# EAGLE board untitled (EAGLE 6.1)
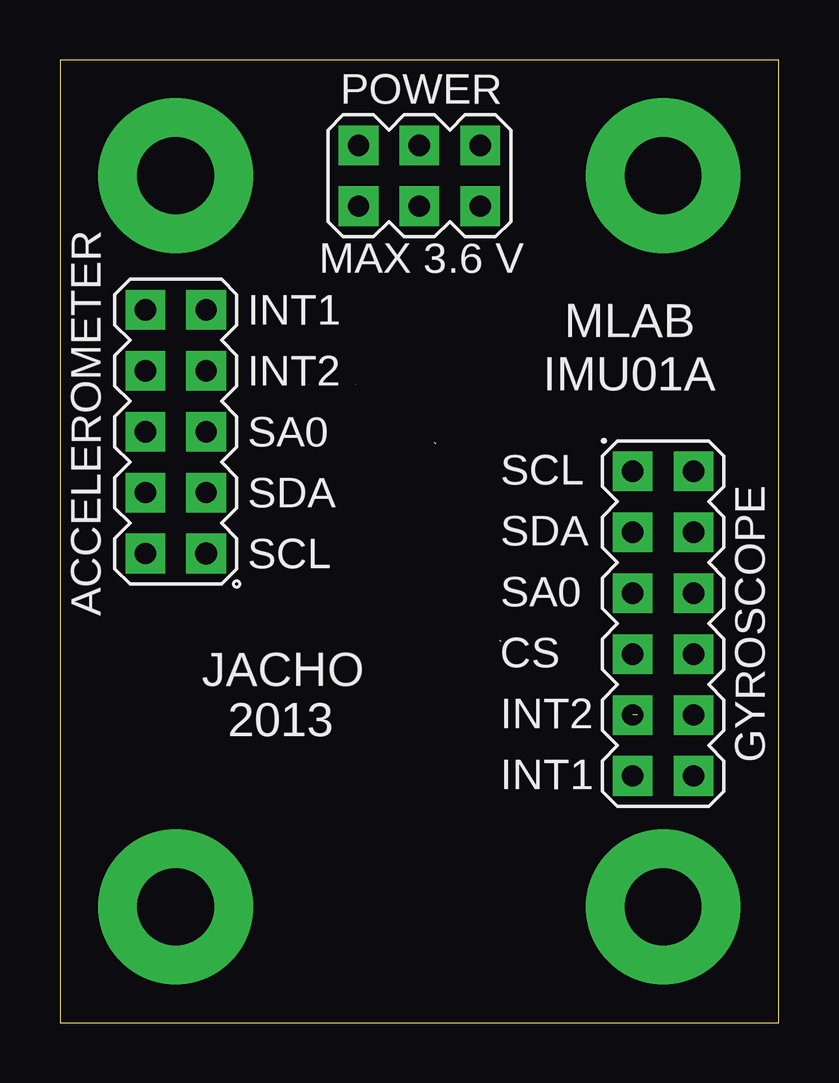
[diagram p0: board, top side]
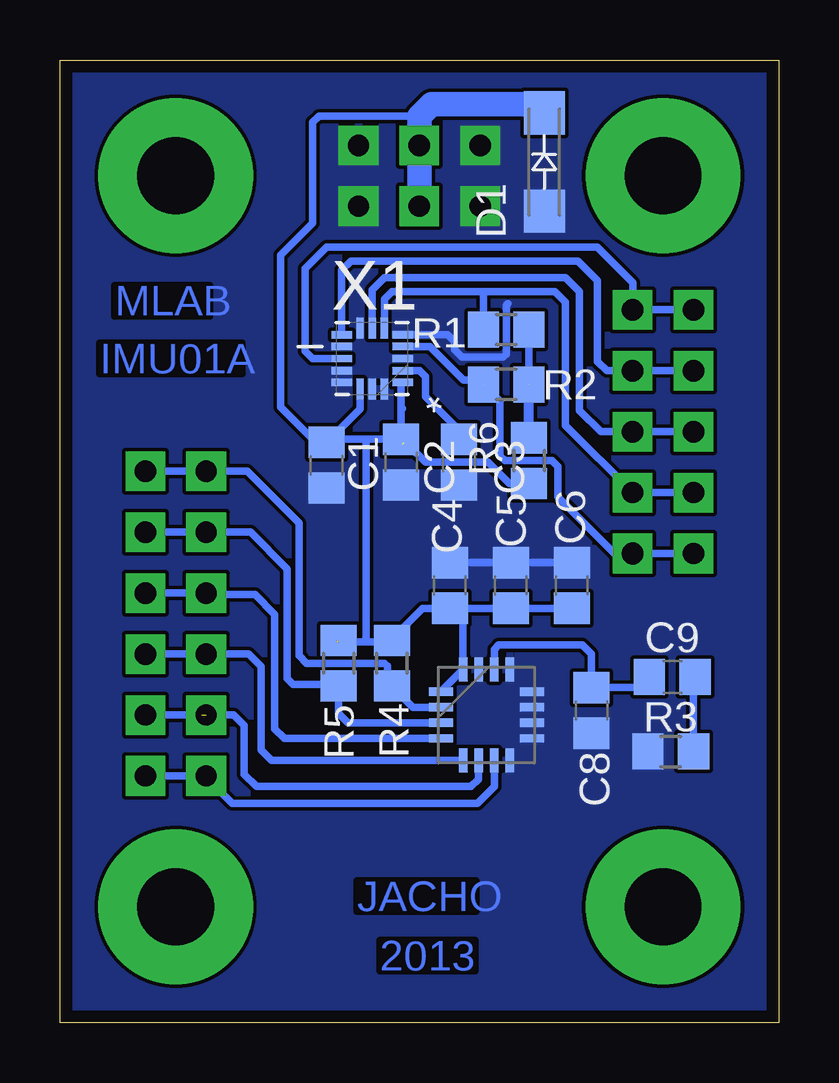
[diagram p1: board, bottom side, seen from below]

Size 29.97 x 40.13 mm. Coordinates in mm from the lower left corner, seen from the top.
Outline: 0,0 29.97,0 29.97,40.13 0,40.13 0,0
Copper layers (1*16): Top 0.035mm / dielectric 1.5mm / Bottom 0.035mm
Design rules: minimum track width 8mil, minimum drill 16mil, track to track 6mil, track to pad 6mil, pad to pad 6mil, via to via 6mil, smd to smd 6mil, copper to edge 20mil, drill to drill 8mil, minimum pad ring 10mil, minimum via ring 8mil, stop-mask expansion 4mil, vias tented up to drill 25mil, thermal gap 0mil

## Footprints (pad centres in the part's own frame; a part is rotated, then mirrored left to right if it is on the bottom)
C0805 = smd 1.3 x 1.5: 1 -0.95,0; 2 0.95,0
SMA = smd 1.8 x 1.7: A -2.05,0; K 2.05,0
R0805 = smd 1.3 x 1.5: 1 -0.95,0; 2 0.95,0
MA03-2 = drill 0.889 pad 1.651 square: 1 -2.54,-1.27; 2 -2.54,1.27; 3 0,-1.27; 4 0,1.27; 5 2.54,-1.27; 6 2.54,1.27
MA06-2 = drill 0.889 pad 1.651 square: 1 -6.35,-1.27; 2 -6.35,1.27; 3 -3.81,-1.27; 4 -3.81,1.27; 5 -1.27,-1.27; 6 -1.27,1.27; 7 1.27,-1.27; 8 1.27,1.27; 9 3.81,-1.27; 10 3.81,1.27; 11 6.35,-1.27; 12 6.35,1.27
MA05-2 = drill 0.914 pad 1.651 square: 1 -5.08,-1.27 | drill 0.889 pad 1.651 square: 2 -5.08,1.27; 3 -2.54,-1.27; 4 -2.54,1.27; 5 0,-1.27; 6 0,1.27; 7 2.54,-1.27; 8 2.54,1.27; 9 5.08,-1.27; 10 5.08,1.27
QFN50P300X300X100-16N = smd 0.864 x 0.305: 1 -1.27,0.991; 2 -1.27,0.508; 3 -1.27,0; 4 -1.27,-0.508; 5 -1.27,-0.991; 9 1.27,-0.991; 10 1.27,-0.508; 11 1.27,0; 12 1.27,0.508; 13 1.27,0.991 | smd 0.305 x 0.864: 6 -0.508,-1.27; 7 0,-1.27; 8 0.508,-1.27; 14 0.508,1.27; 15 0,1.27; 16 -0.508,1.27
LGA16 = smd 1 x 0.35: 1 -1.9,0.975; 2 -1.9,0.325; 3 -1.9,-0.325; 4 -1.9,-0.975; 9 1.9,-0.975; 10 1.9,-0.325; 11 1.9,0.325; 12 1.9,0.975 | smd 0.35 x 1: 5 -0.975,-1.9; 6 -0.325,-1.9; 7 0.325,-1.9; 8 0.975,-1.9; 13 0.975,1.9; 14 0.325,1.9; 15 -0.325,1.9; 16 -0.975,1.9
SROUB3M = drill 3.2 pad 6.452: P$1 0,0

## Placement (x,y rotation side)
C1  4u7  [C0805]  18.86,23.24 270 bottom
C2  100n  [C0805]  15.75,23.37 270 bottom
C3  100n  [C0805]  13.34,23.37 270 bottom
C4  100n  [C0805]  13.72,18.22 90 bottom
C5  4u7  [C0805]  11.18,18.22 90 bottom
C6  4u7  [C0805]  8.64,18.22 90 bottom
C8  10nF  [C0805]  7.81,13.02 270 bottom
C9  470nF  [C0805]  4.45,14.41 0 bottom
D1  [SMA]  9.78,35.88 90 bottom
R1  4k7  [R0805]  11.37,28.89 180 bottom
R2  4k7  [R0805]  11.37,26.61 180 bottom
R3  10k  [R0805]  4.51,11.3 0 bottom
R4  10k  [R0805]  16.13,14.99 270 bottom
R5  10k  [R0805]  18.35,14.99 270 bottom
R6  0R  [R0805]  10.41,23.43 90 bottom
SV1  [MA03-2]  14.99,35.31 180 top
SV2  [MA06-2]  25.15,16.64 270 top
SV3  [MA05-2]  4.83,24.64 90 top
X1  MMA8451Q  [QFN50P300X300X100-16N]  16.95,27.69 180 bottom
X2  A3G4250D  [LGA16]  12.19,12.83 0 bottom
X3  SROUB3M  [SROUB3M]  4.83,4.83 0 top
X4  SROUB3M  [SROUB3M]  4.83,35.31 0 top
X5  SROUB3M  [SROUB3M]  25.15,4.83 0 top
X6  SROUB3M  [SROUB3M]  25.15,35.31 0 top

## Library data of the parts
C1-C6 C8 C9 R1-R6 = rcl
D1 X3-X6 = moje
SV1-SV3 = moje_hrebinky; OC_FARNELL: unknown; OC_NEWARK: unknown
X1 X2 = moje_cidla

## Nets
+VCC: C1.1 C2.1 C4.1 C5.1 C6.1 D1.K R4.1 R5.1 R6.1 SV1.3 SV1.4 X1.1 X1.14 X2.1 X2.16
GND: C1.2 C2.2 C3.2 C4.2 C5.2 C6.2 C8.2 D1.A R3.1 SV1.1 SV1.2 SV1.5 SV1.6 X1.3 X1.5 X1.8 X1.10 X1.12 X1.13 X1.15 X1.16 X2.8 X2.9 X2.10 X2.11 X2.12 X2.13 X2.15
N$1: R1.2 SV3.3 SV3.4 X1.6
N$2: R2.2 SV3.1 SV3.2 X1.4
N$3: SV3.5 SV3.6 X1.7
N$4: C8.1 C9.1 X2.14
N$5: C3.1 X1.2
N$6: SV2.5 SV2.6 X2.4
N$7: R1.1 R2.1 R6.2
N$9: SV2.7 SV2.8 X2.5
N$10: SV2.11 SV2.12 X2.7
N$11: SV2.9 SV2.10 X2.6
N$12: SV3.9 SV3.10 X1.11
N$13: SV3.7 SV3.8 X1.9
N$14: R4.2 SV2.1 SV2.2 X2.2
N$15: C9.2 R3.2
N$16: R5.2 SV2.3 SV2.4 X2.3

## Tracks (layer width: path | path; a pad name or v marks a point on that pad's centre or on a via)
+VCC  (2 unrouted)
  Bottom 0.305: X2.1 X2.16 13.17,16.73 C4.1 | C4.1 C5.1 C6.1 | C2.1 15.75,25.65 | 15.75,25.65 15.75,26.63 X1.1 | X1.14 17.46,25.59 C1.1 18.92,24.26 | 19.3,23.88 18.99,24.19 | 18.99,24.19 18.92,24.26 | 18.92,24.26 18.86,24.32 17.14,24.32 | 17.14,24.32 C2.1 | 18.92,24.26 18.99,24.26 | 19.05,24.19 18.99,24.26 | 18.99,24.26 18.99,24.19 | 18.99,24.19 19.3,24.19 20.76,25.65 20.76,32 19.43,33.34 19.43,37.53 19.18,37.78 14.99,37.78 | 15.68,25.59 15.75,25.65 | C2.1 15.62,24.19 15.62,24.32 15.56,24.38 | R6.1 11.24,22.48 12.13,23.37 14.73,23.37 15.43,24.07 15.62,24.07 15.68,24.13 | C4.1 14.86,17.27 16.19,15.94 R4.1 | R4.1 16.07,15.88 17.14,15.88 | 17.14,15.88 18.41,15.88 | 17.21,16 17.21,24.26 17.14,24.32 | 17.21,16 17.27,15.94 | R4.1 | 17.21,16 17.21,15.94 17.14,15.88 | 13.72,38.48 13.53,38.29
  Bottom 1.016: SV1.4 SV1.3 | SV1.3 15.05,36.64 | SV1.3 14.99,37.78 14.48,38.29 13.53,38.29 10.14,38.29 D1.K
GND
  Bottom 0.305: C6.2 C5.2 C4.2 | X1.5 13.82,28.68 13.53,28.38 13.53,28.07 13.21,27.75 11.49,27.75 11.37,27.88 11.37,29.91 11.3,29.97
  pour Bottom: -1.14,41.15 32.45,41.15 32.45,-2.6 -1.4,-2.6 -1.4,41.02
N$1
  Bottom 0.305: SV3.4 SV3.3 8.89,24.89 8.89,30.04 9.33,30.48 12.32,30.48 | X1.6 16.45,30.16 16.13,30.48 12.32,30.48 | R1.2 12.32,30.48
N$2  (1 unrouted)
  Bottom 0.305: SV3.2 SV3.1 6.86,19.56 9.21,21.91 9.21,23.18 9.46,23.43 11.43,23.43 11.62,23.62 11.62,25.91 R2.2 | X1.4 14.54,28.19 13.14,26.8 12.51,26.8 R2.2
N$3
  Bottom 0.305: SV3.6 SV3.5 7.43,24.64 8.32,25.53 8.32,30.48 8.89,31.05 16.45,31.05 16.95,30.54 X1.7
N$4
  Bottom 0.305: X2.14 11.87,15.57 11.68,15.75 8.19,15.75 7.81,15.37 C8.1 5.84,13.97 C9.1
N$5
  Bottom 0.305: C3.1 13.27,24.64 14.73,26.1 14.73,26.92 14.99,27.18 X1.2
N$6
  Bottom 0.305: X2.4 20.61,11.85 21.02,12.26 21.02,17.02 21.84,17.84 23.81,17.84 SV2.5 SV2.6
N$7  (1 unrouted)
  Bottom 0.305: R1.1 R2.1 | R2.1 | R2.1 10.48,26.67
  Bottom 0.406: R6.2 R2.1
N$9
  Bottom 0.305: X2.5 21.15,10.93 21.59,11.37 21.59,14.86 22.1,15.37 SV2.7 SV2.8
N$10
  Bottom 0.305: SV2.12 23.94,10.29 | 23.94,10.29 SV2.11 | X2.7 11.87,9.85 12.57,9.14 22.8,9.14 23.94,10.29
N$11  (2 unrouted)
  Bottom 0.305: 24.07,12.83 SV2.10 | X2.6 12.52,10.15 12.83,9.84 21.78,9.84 22.29,10.35 22.29,12.38 22.73,12.83 24,12.83
N$12
  Bottom 0.305: X1.11 19.43,27.69 19.75,28 19.75,31.43 18.86,32.32 7.56,32.32 6.1,30.86 SV3.9 SV3.10
N$13
  Bottom 0.305: SV3.8 SV3.7 7.18,27.18 7.56,27.56 7.56,30.92 8.38,31.75 17.84,31.75 18.22,31.37 X1.9
N$14
  Bottom 0.305: SV2.2 SV2.1 22.16,22.99 20,20.83 20,15.3 19.68,14.99 16.45,14.99 16.32,14.86 16.32,14.04 R4.2 15.25,13.15 X2.2
N$15
  Bottom 0.305: R3.2 3.56,14.35 C9.2
N$16
  Bottom 0.305: SV2.4 SV2.3 22.03,20.45 20.51,18.92 20.51,14.35 20.26,14.1 18.41,14.1 R5.2 18.35,12.89 17.96,12.5 X2.3

## Text on the board
Bottom: MLAB | IMU01A | JACHO | 2013
tPlace: POWER | MAX 3.6 V | INT1 | MLAB | INT2 | IMU01A | SA0 | SCL | SDA | SDA | SCL | SA0 | ACCELEROMETER | CS | JACHO | INT2 | 2013 | GYROSCOPE | INT1